# EAGLE board filter (EAGLE 8.6.0)
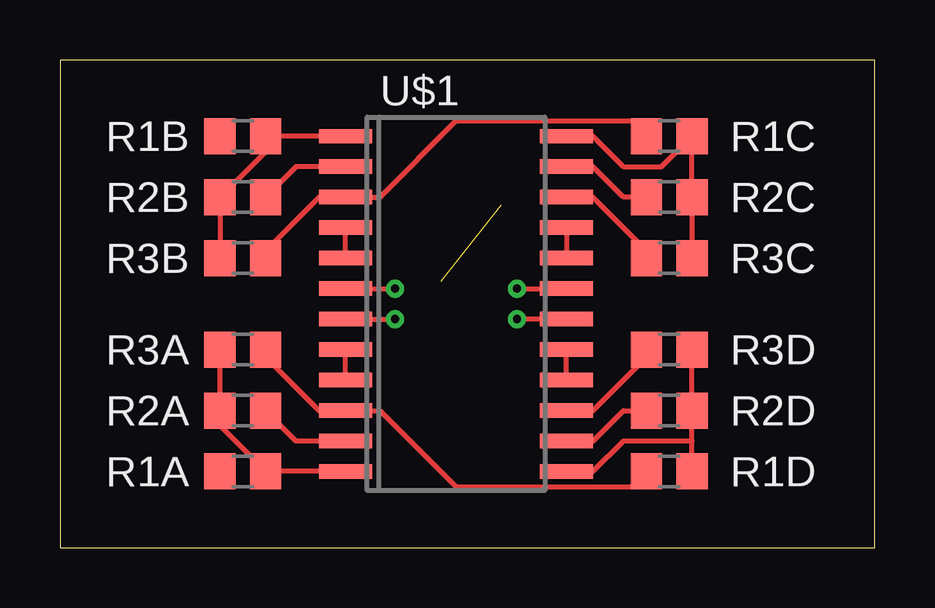
[diagram p0: board, top side]
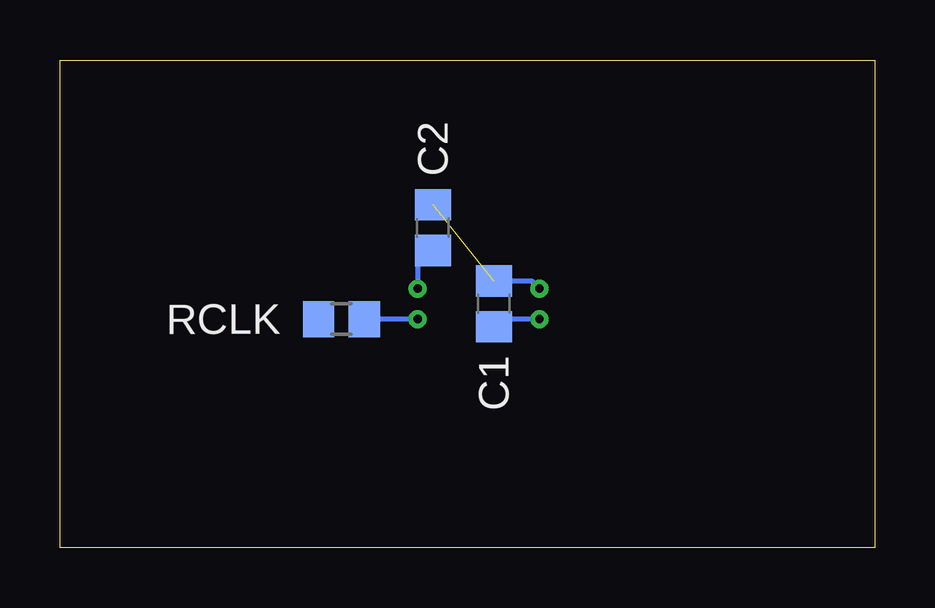
[diagram p1: board, bottom side, seen from below]

Size 33.96 x 20.32 mm. Coordinates in mm from the lower left corner, seen from the top.
Outline: 0,0 33.96,0 33.96,20.32 0,20.32 0,0
Copper layers (1*16): Top 0.035mm / dielectric 1.5mm / Bottom 0.035mm
Design rules "default": minimum track width 6mil, minimum drill 0.35mm, track to track 6mil, track to pad 6mil, pad to pad 6mil, via to via 6mil, smd to smd 6mil, copper to edge 40mil, drill to drill 6mil, minimum pad ring 10mil, minimum via ring 8mil, stop-mask expansion 4mil, vias tented up to drill 0mil, thermal gap 10mil

## Footprints (pad centres in the part's own frame; a part is rotated, then mirrored left to right if it is on the bottom)
C0805 = smd 1.3 x 1.5: 1 -0.95,0; 2 0.95,0
R0805 = smd 1.3 x 1.5: 1 -0.95,0; 2 0.95,0
SO24W = smd 0.6 x 2.2: 1 -6.985,-4.6; 2 -5.715,-4.6; 3 -4.445,-4.6; 4 -3.175,-4.6; 5 -1.905,-4.6; 6 -0.635,-4.6; 7 0.635,-4.6; 8 1.905,-4.6; 9 3.175,-4.6; 10 4.445,-4.6; 11 5.715,-4.6; 12 6.985,-4.6; 13 6.985,4.6; 14 5.715,4.6; 15 4.445,4.6; 16 3.175,4.6; 17 1.905,4.6; 18 0.635,4.6; 19 -0.635,4.6; 20 -1.905,4.6; 21 -3.175,4.6; 22 -4.445,4.6; 23 -5.715,4.6; 24 -6.985,4.6

## Placement (x,y rotation side)
C1  0.1u  [C0805]  15.88,10.16 90 bottom
C2  0.1u  [C0805]  18.41,13.34 270 bottom
R1A  350k  [R0805]  7.62,3.17 0 top
R1B  350k  [R0805]  7.62,17.14 0 top
R1C  350k  [R0805]  25.4,17.14 180 top
R1D  350k  [R0805]  25.4,3.17 0 top
R2A  10k  [R0805]  7.62,5.71 0 top
R2B  10k  [R0805]  7.62,14.61 0 top
R2C  10k  [R0805]  25.4,14.61 0 top
R2D  10k  [R0805]  25.4,5.71 180 top
R3A  350k  [R0805]  7.62,8.26 0 top
R3B  350k  [R0805]  7.62,12.06 0 top
R3C  350k  [R0805]  25.4,12.06 0 top
R3D  350k  [R0805]  25.4,8.26 180 top
RCLK  200  [R0805]  22.23,9.53 180 bottom
U$1  LTC1264SMD  [SO24W]  16.51,10.16 270 top

## Library data of the parts
C1 C2 = rcl; SPICEPREFIX: C
R1A R1B R1C R1D R2A R2B R2C R2D R3A R3B R3C R3D RCLK = rcl; SPICEPREFIX: R
U$1 = ARVP

## Nets
+5V: C1.1 U$1.7
-5V: C2.2 U$1.19
CLK: RCLK.2
GND: C1.2 C2.1 U$1.6
IN_A: R1A.1
IN_B: R1B.1
N$2: R2D.2 U$1.14
N$3: R1D.2 R2D.1 R3D.1 U$1.13
N$5: U$1.16 U$1.17
N$6: R2C.1 U$1.23
N$7: R1C.1 R2C.2 R3C.2 U$1.24
N$9: R2B.2 U$1.2
N$10: R1B.2 R2B.1 R3B.1 U$1.1
N$12: U$1.4 U$1.5
N$13: U$1.20 U$1.21
N$14: RCLK.1 U$1.18
N$16: R2A.2 U$1.11
N$18: U$1.8 U$1.9
N$32: R1A.2 R2A.1 R3A.1 U$1.12
OUT_2ND_A: R1D.1 R3A.2 U$1.10
OUT_2ND_ORDER_B: R1C.2 R3B.2 U$1.3
OUT_A: R3D.2 U$1.15
OUT_B: R3C.1 U$1.22

## Tracks (layer width: path | path; a pad name or v marks a point on that pad's centre or on a via)
+5V  (via drill 0.35)
  Top 0.203: U$1.7 v13.97,9.53
  Bottom 0.203: v13.97,9.53 15.56,9.53 C1.1
-5V  (via drill 0.35)
  Top 0.203: v19.05,10.79 U$1.19
  Bottom 0.203: C2.2 19.05,11.75 v19.05,10.79
GND  (via drill 0.35)  (1 unrouted)
  Top 0.203: U$1.6 v13.97,10.79
  Bottom 0.203: v13.97,10.79 14.29,11.11 C1.2
N$2
  Top 0.203: U$1.14 22.23,4.45 23.5,5.71 R2D.2
N$3
  Top 0.203: R1D.2 26.35,4.45 | 26.35,4.45 R2D.1 R3D.1 | 26.35,4.45 23.5,4.45 22.23,3.17 U$1.13
N$5
  Top 0.203: U$1.16 U$1.17
N$6
  Top 0.203: R2C.1 23.5,14.61 22.23,15.88 U$1.23
N$7
  Top 0.203: U$1.24 22.23,17.14 23.5,15.88 25.08,15.88 26.19,16.99 | 26.19,16.99 R1C.1 | 26.19,16.99 26.35,16.83 R2C.2 R3C.2
N$9
  Top 0.203: U$1.2 9.84,15.88 R2B.2
N$10
  Top 0.203: U$1.1 R1B.2 8.57,16.5 R2B.1 R3B.1
N$12
  Top 0.203: U$1.5 U$1.4
N$13
  Top 0.203: U$1.21 U$1.20
N$14  (via drill 0.35)
  Top 0.203: U$1.18 v19.05,9.53
  Bottom 0.203: v19.05,9.53 RCLK.1
N$16
  Top 0.203: R2A.2 9.84,4.45 U$1.11
N$18
  Top 0.203: U$1.9 U$1.8
N$32
  Top 0.203: U$1.12 R1A.2 6.67,5.08 R2A.1 R3A.1
OUT_2ND_A
  Top 0.203: R3A.2 8.57,7.94 10.79,5.71 U$1.10 13.34,5.71 16.51,2.54 23.82,2.54 R1D.1
OUT_2ND_ORDER_B
  Top 0.203: R3B.2 8.57,12.38 10.79,14.61 U$1.3 13.34,14.61 16.51,17.78 23.82,17.78 R1C.2
OUT_A
  Top 0.203: U$1.15 22.23,5.71 24.45,7.94 R3D.2
OUT_B
  Top 0.203: U$1.22 22.23,14.61 24.45,12.38 R3C.1